# Altium PCB 150W LED Driver.PcbDoc
Units mm, origin at the board's own origin, x right, y up, seen from the top; angles counter-clockwise.
Board outline 72.5 x 50 mm, 4 copper layers (Top Layer, Layer 1, Layer 2, Bottom Layer), stack 1.573 mm thick; 37 components, 22 nets, 125 pads, 160 vias.
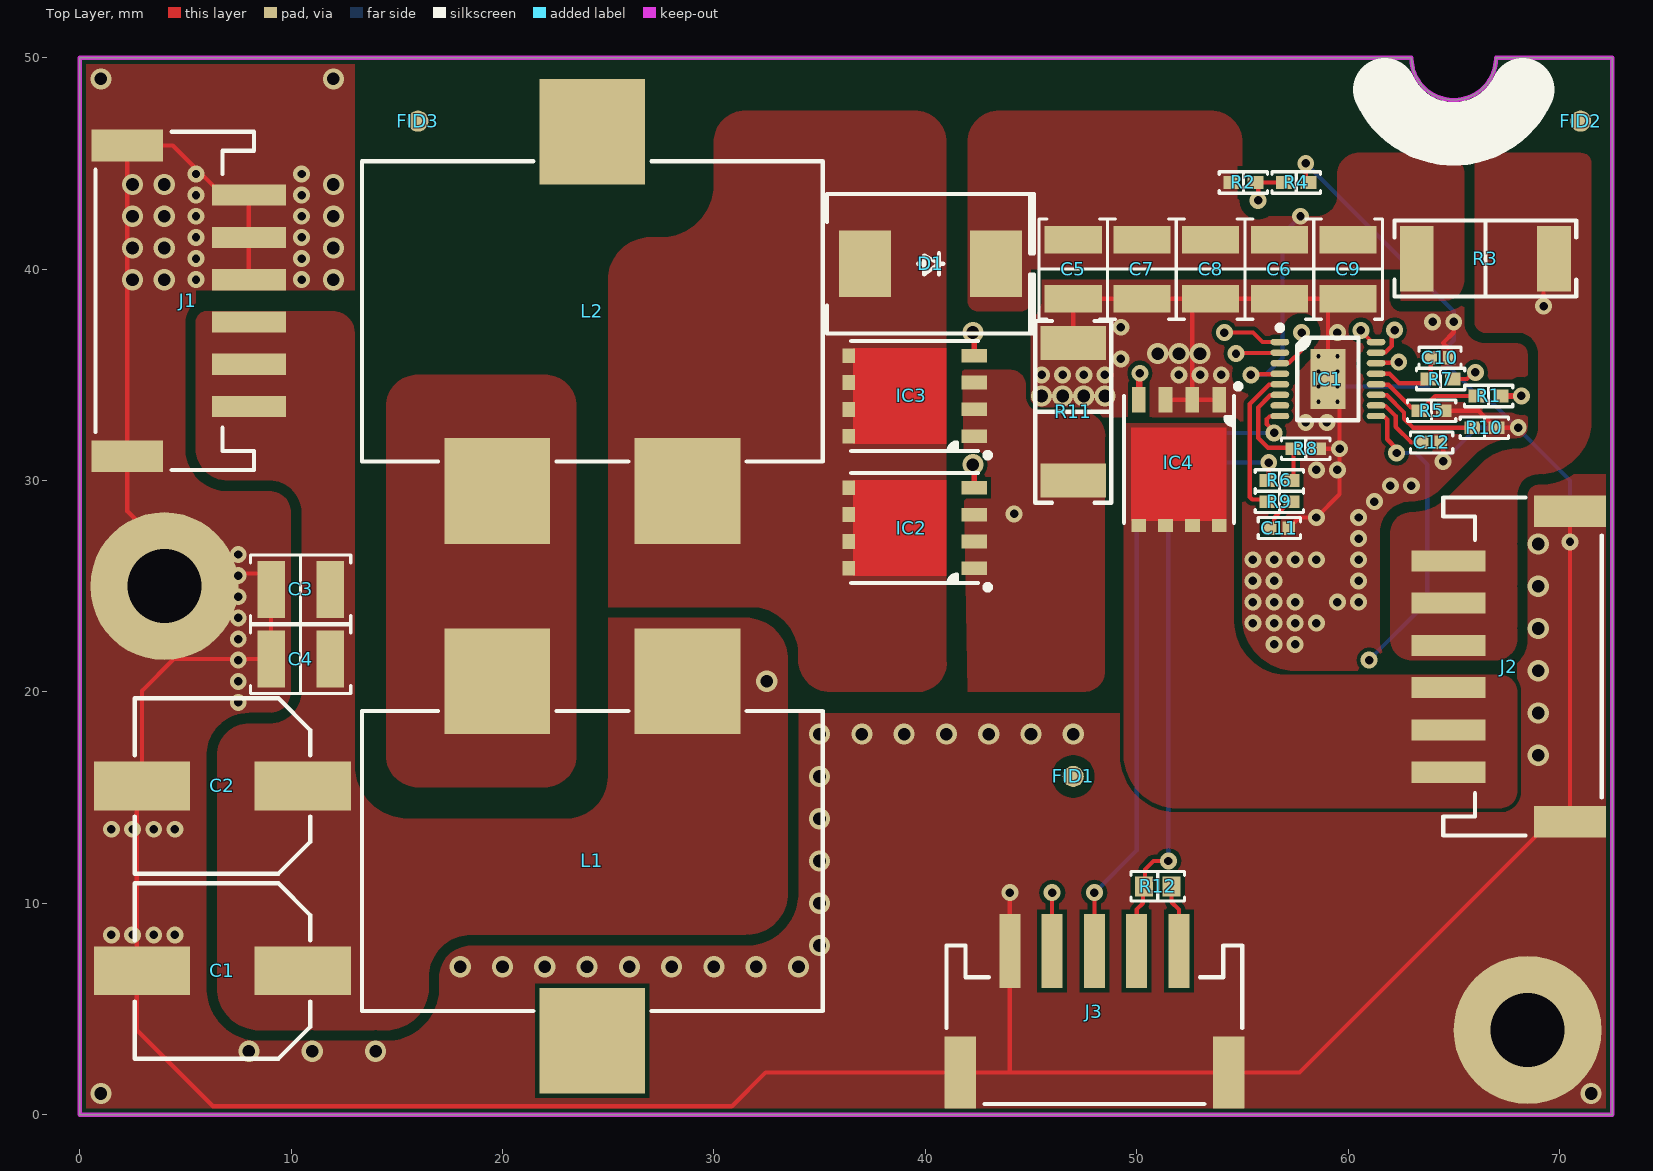
[diagram p0: Top Layer view]
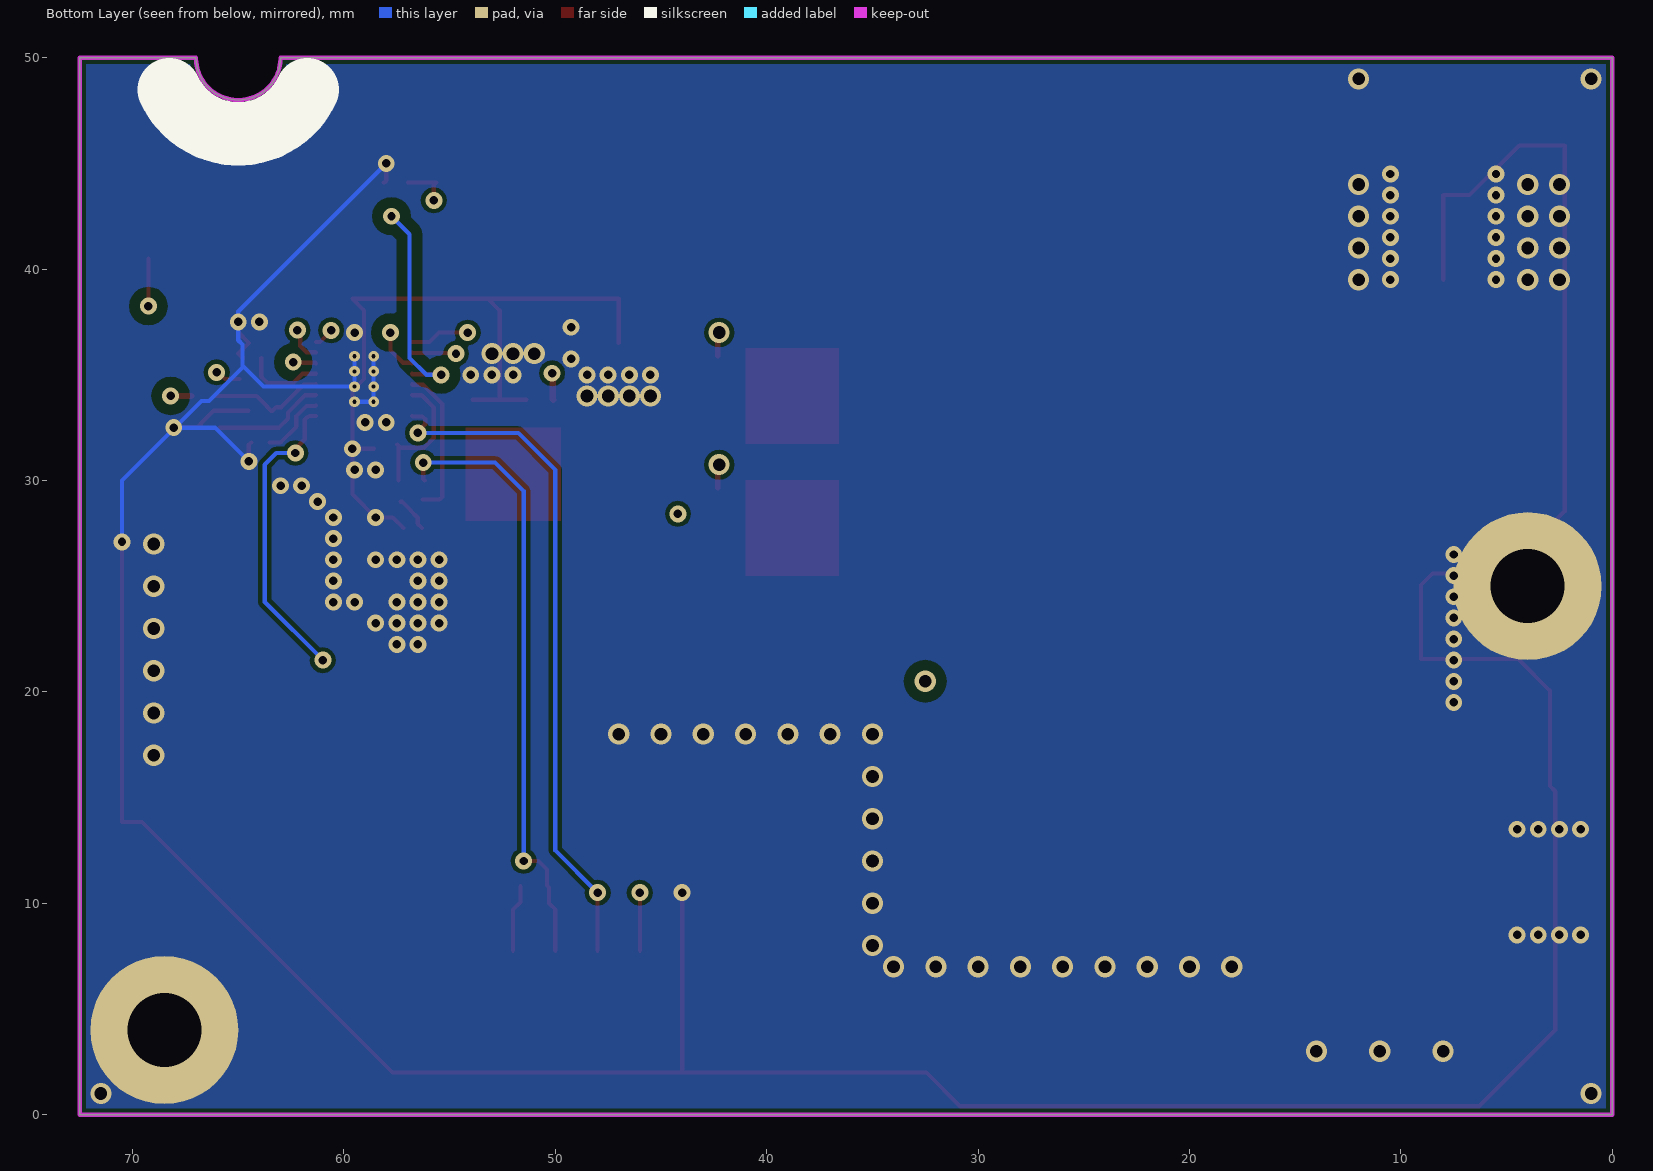
[diagram p1: Bottom Layer view, seen from below]
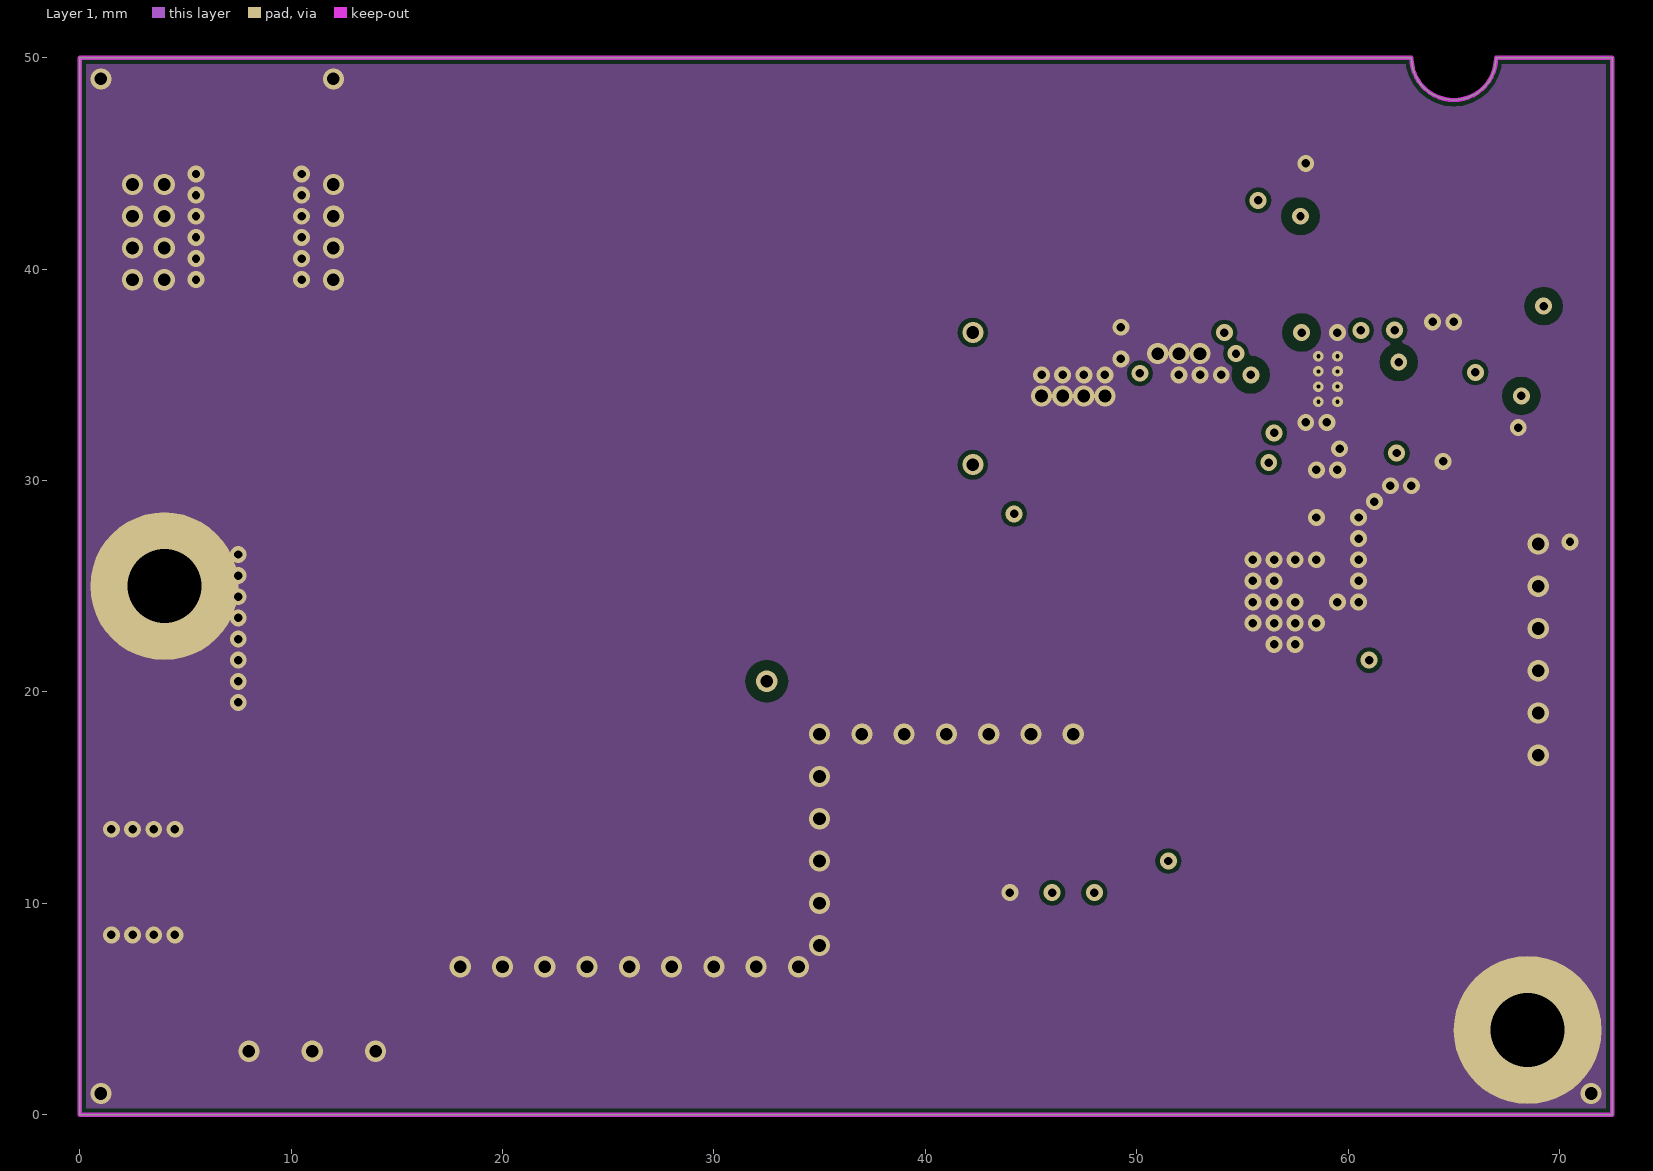
[diagram p2: Layer 1]
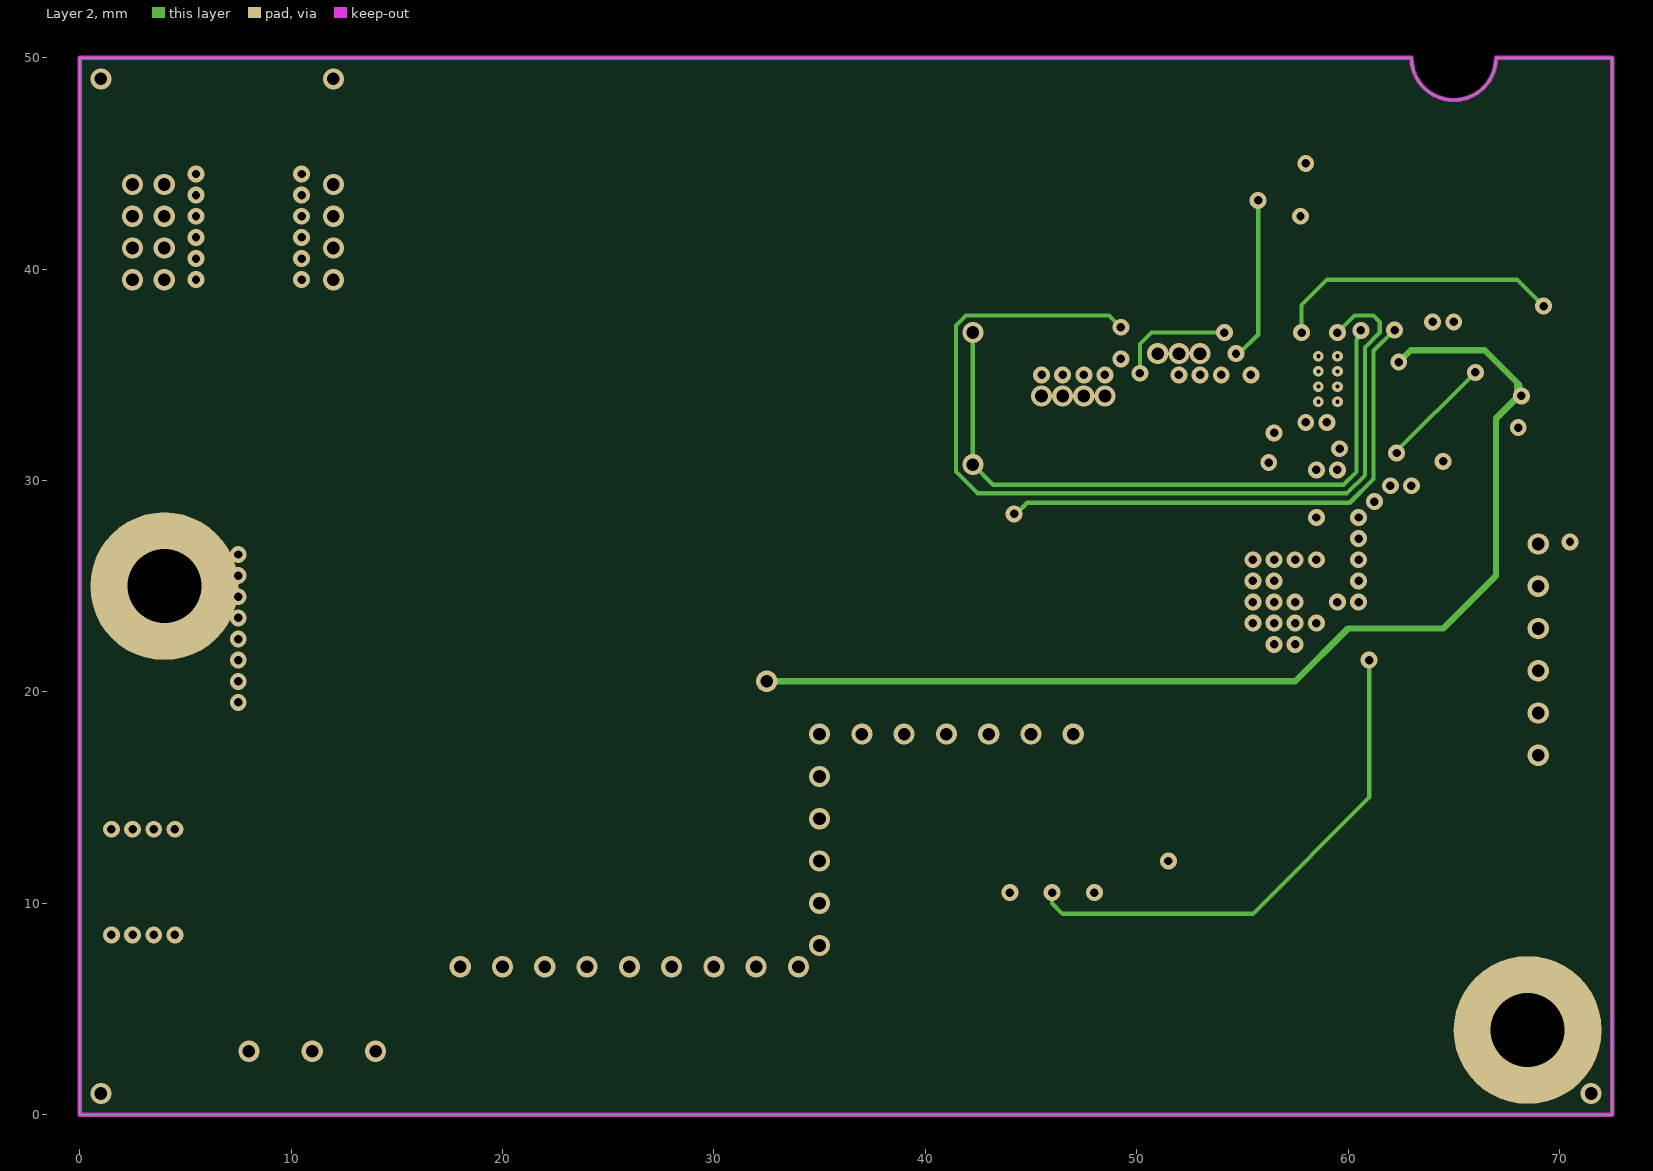
[diagram p3: Layer 2]

## Layer stack, top to bottom
Top Solder: solder mask 0.01, Solder Resist, Dk 3.5
Top Layer: signal copper 0.036
Dielectric 1: prepreg 0.2, PP-006, Dk 4.1
Layer 1: signal copper 0.018
Dielectric1: core 1.065, FR-4, Dk 4.8
Layer 2: signal copper 0.018
Dielectric 2: prepreg 0.2, PP-006, Dk 4.1
Bottom Layer: signal copper 0.036
Bottom Solder: solder mask 0.01, Solder Resist, Dk 3.5

## Board outline
0,0 0,50 63,50 ccw(c65,50) 65,48 ccw(c65,50) 67,50 72.5,50 72.5,0

## Design rules (kind name [scope] priority, off if disabled: settings)
Clearance Clearance_HV_Exception [WithinRoom('ClearanceException') AND InNetClass('HV') vs WithinRoom('ClearanceException') AND InNetClass('LP')] p1: gap=0.19 ignorepadtopadclearanceinfootprint=FALSE // Clearance exception for driver IC
Clearance Clearance_HV [InNetClass('HV') vs InNetClass('LP')] p2: gap=0.5 ignorepadtopadclearanceinfootprint=TRUE
Clearance PadClearance [IsPad vs IsPad] p3: gap=0.2 ignorepadtopadclearanceinfootprint=FALSE except(0: Arc-Hole Track-Hole SMDPad-Hole THPad-Hole Via-Hole Fill-Hole Poly-Hole Region-Hole Text-Hole; 0.15: SMDPad-SMDPad)
Clearance [All] p4: gap=0.2 ignorepadtopadclearanceinfootprint=FALSE except(0: Arc-Hole Track-Hole SMDPad-Hole THPad-Hole Via-Hole Fill-Hole Poly-Hole Region-Hole Text-Hole)
Creepage [InNetClass('HV') vs InNetClass('LP')] p1: checkdistance=0.2
HoleSize [All] p1: absolutevalues=TRUE maxlimit=6 minlimit=0.2 maxpercent=80.000 minpercent=20.000
HoleToHoleClearance [All] p1: gap=0.2 allowstackedmicrovias=TRUE
MinimumAnnularRing [All] p1: minimumring=0.15
MinimumSolderMaskSliver [All] p1: minsoldermaskwidth=0
PolygonConnect ViaConnect [IsVia] p1: connectstyle=Direct reliefconductorwidth=0.254 reliefentries=4 polygonreliefangle="90 Angle" airgapwidth=0.254
PolygonConnect [All] p2: connectstyle=Direct reliefconductorwidth=0.3 reliefentries=4 polygonreliefangle="90 Angle" airgapwidth=0.254
RoomDefinition ClearanceException [False] p1: confinementstyle=ConfineIn formatcopy=TRUE lockcomponents=FALSE outline 54.7,37.1 62.5,37.1 62.5,33.5 54.7,33.5
RoutingVias [All] p1: holewidth=0.6 width=1 viastyle="Through Hole" minholewidth=0.4 minwidth=0.8 maxholewidth=5 maxwidth=6
SilkToSilkClearance [All] p1: silktosilkclearance=0
SilkToSolderMaskClearance SilkscreenOverComponentPads [IsPad] p1: minsilkscreentomaskgap=0.05 clearancetoexposedcopper=TRUE
SolderMaskExpansion "Via Tenting" [IsVia] p1: expansion=-2 istentingtop=FALSE
SolderMaskExpansion [All] p2: expansion=0.102 istentingtop=FALSE
Width [All] p1: maxlimit=2 minlimit=0.2 preferedwidth=0.4
25 further rules are at their usual default settings.

## Classes and differential pairs
net class LP: CTRL FB GATE GND IADJ INTVCC LED_GND NetC11_2 NetC12_2 NetIC1_5 NetIC1_11 OPENLED PWMOUT SENSE UVLO
net class HV: 48V ISN ISP NetL1_2 SW
component class DRV: C1 C2 C3 C4 C5 C6 C7 C8 C9 C10 C11 C12 D1 IC1 IC2 IC3 IC4 L1 L2 R1 R2 R3 R4 R5 R6 R7 R8 R9 R10 R11
component class Connections: FID1 FID2 FID3 J1 J2 J3 R12

## Components (designator, comment, footprint, x,y, rotation, side; value= is the part's Value field where it differs from the comment)
C1 "47µF" "CAP ALSMD 8.3MM H10.5MM" 6.75,6.8 r180 top
C2 "47µF" "CAP ALSMD 8.3MM H10.5MM" 6.75,15.55 r180 top
C3 "10µF" "CAP 1210_3225 - 2.8MM" 10.45,24.85 r0 top
C4 "10µF" "CAP 1210_3225 - 2.8MM" 10.45,21.55 r0 top
C5 "4.7µF" "CAP 1210_3225 - 2.8MM" 47,40 r90 top
C6 "4.7µF" "CAP 1210_3225 - 2.8MM" 56.75,40 r90 top
C7 "4.7µF" "CAP 1210_3225 - 2.8MM" 50.25,40 r90 top
C8 "4.7µF" "CAP 1210_3225 - 2.8MM" 53.5,40 r90 top
C9 "4.7µF" "CAP 1210_3225 - 2.8MM" 60,40 r90 top
C10 "4.7µF" "CAP 0402_1005" 64.35,35.8 r180 top
C11 "2200pF" "CAP 0402_1005" 56.75,27.75 r180 top
C12 "0.1µF" "CAP 0402_1005" 63.95,31.8 r180 top
D1 "SK810L-TP" "DO214AB SMC" 40.25,40.25 r0 top
FID1 "Fiducial" Fiducial 47,16 r90 top
FID2 "Fiducial" Fiducial 71,47 r90 top
FID3 "Fiducial" Fiducial 16,47 r90 top
IC1 "LT3756EMSE-2#TRPBF" "LTC MSOP-16 MSE16" 59.05,34.8 r0 top
IC2 "BSC060N10NS3GATMA1" "INFINEON PG-TDSON-8" 39.5,27.75 r180 top
IC3 "BSC060N10NS3GATMA1" "INFINEON PG-TDSON-8" 39.5,34 r180 top
IC4 "BSC060N10NS3GATMA1" "INFINEON PG-TDSON-8" 52,31 r270 top
J1 "S6B-PH-SM4-TB(LF)(SN)" "JST S6B-PH-SM4-TB" 3.75,38.5 r90 top
J2 "S6B-PH-SM4-TB(LF)(SN)" "JST S6B-PH-SM4-TB" 69,21.2 r270 top
J3 "S5B-PH-SM4-TB(LF)(SN)" "JST S5B-PH-SM4-TB" 48,3.5 r180 top
L1 "47µH" "WURTH WE-HCF 14.5MM" 24.25,12 r180 top
L2 "47µH" "WURTH WE-HCF 14.5MM" 24.25,38 r0 top
R1 "732 kOhms" "RES 0402_1005" 66.65,34 r0 top
R2 "787 kOhms" "RES 0402_1005" 55.05,44.1 r180 top
R3 "56 mOhms" "STACKPOLE CSR2512" 66.5,40.5 r180 top
R4 "10 kOhms" "RES 0402_1005" 57.55,44.1 r180 top
R5 "23.2 kOhms" "RES 0402_1005" 63.95,33.3 r180 top
R6 "17.4 kOhms" "RES 0402_1005" 56.75,30 r0 top
R7 "100 kOhms" "RES 0402_1005" 64.375,34.8 r0 top
R8 "10 kOhms" "RES 0402_1005" 58,31.5 r180 top
R9 "10 kOhms" "RES 0402_1005" 56.75,29 r0 top
R10 "42.2 kOhms" "RES 0402_1005" 66.45,32.5 r180 top
R11 "20 mOhms" "STACKPOLE CSR2512" 47,33.25 r270 top
R12 "0 Ohms" "RES 0603_1608" 51,10.8 r0 top

## Footprints (in the part's own frame and the unit in brackets; to place one, negate y for a bottom-side part, rotate by r counter-clockwise, add the part's x,y. Pads: shape width x height; smd on the part's side, far side on the other; paste and mask are expansions set on the pad)
"CAP 0402_1005" [mm] "Chip Capacitor, 2-Leads, Body 1.02x0.51mm, IPC Medium Density"
  rect 0.6x0.64 smd: 1(-0.44,0) 2(0.44,0)
  silkscreen extent -1,-0.5 1,0.5, body extent -0.5,-0.26 0.5,0.26, height 0.52
"CAP 1210_3225 - 2.8MM" [mm] "Chip Capacitor, 2-Leads, Body 3.20x2.50mm, IPC Medium Density"
  rect 1.3x2.7 smd: 1(-1.4,0) 2(1.4,0)
  silkscreen extent -2.37,-1.63 2.37,1.63, body extent -1.6,-1.25 1.6,1.25, height 2.8
"CAP ALSMD 8.3MM H10.5MM" [mm] "Aluminum Electrolytic Capacitor, Body 8.30x8.30x10.50mm, IPC Low Density"
  rect 4.55x2.3 smd: 1(-3.8,0) 2(3.8,0)
  silkscreen extent -4.15,-4.15 4.15,4.15, body extent -4.95,-4.15 4.95,4.15, height 10.5
"DO214AB SMC" [mm] "Molded Diode, 2-Leads, Body 6.85x5.90mm, IPC Medium Density"
  rect 2.45x3.15 smd: 1(-3.1,0) 2(3.1,0)
  silkscreen extent -4.9,-3.3 4.9,3.3, body extent -3.97,-2.95 3.97,2.95, height 2.6
Fiducial [mm]
  round 1 smd paste-1 mask+0.5: F(0,0)
  Top Layer pour cut-out: 0,0
  Top Layer pour cut-out: -1,0 -0.924,0.383 -0.707,0.707 -0.383,0.924 0,1 0,1 0.383,0.924 0.707,0.707 0.924,0.383 1,0 1,0 0.924,-0.383 0.707,-0.707 0.383,-0.924 0,-1 0,-1 -0.383,-0.924 -0.707,-0.707 -0.924,-0.383 -1,0
"INFINEON PG-TDSON-8" [mm] "TDSON, 8-Leads, Body 6x5mm, Pitch 1.27mm, Thermal Pad 1.65x2.38mm, IPC Medium Density"
  rect 1.2x0.65 smd: 1(-2.825,1.905) 2(-2.825,0.635) 3(-2.825,-0.635) 4(-2.825,-1.905)
  rect 0.6x0.7 smd: 5(3.125,-1.905) 6(3.125,-0.635) 7(3.125,0.635) 8(3.125,1.905)
  Top Layer region: -1.5,-2.25 2.9,-2.25 2.9,2.25 -1.5,2.25
  silkscreen extent -3.58,-2.6 3,2.92, body extent -3.07,-2.58 3.08,2.57, height 1
"JST S5B-PH-SM4-TB" [mm] "JST PH Series 2mm pitch, side entry connector"
  rect 1x3.5 smd: 1(-4,-4.25) 2(-2,-4.25) 3(0,-4.25) 4(2,-4.25) 5(4,-4.25)
  rect 1.5x3.4 smd: M(-6.35,1.5) M(6.35,1.5)
  silkscreen extent -7,-4.5 7,3, body extent -6.95,-5.6 6.95,3.01, height 5.6
"JST S6B-PH-SM4-TB" [mm] "JST PH Series 2mm pitch, side entry connector"
  rect 1x3.5 smd: 1(-5,-4.25) 2(-3,-4.25) 3(-1,-4.25) 4(1,-4.25) 5(3,-4.25) 6(5,-4.25)
  rect 1.5x3.4 smd: M(-7.35,1.5) M(7.35,1.5)
  silkscreen extent -8,-4.5 8,3, body extent -7.95,-5.6 7.95,3.01, height 5.6
"LTC MSOP-16 MSE16" [mm] "16-Lead Plastic MSOP, Exposed Die Pad"
  oval 0.889x0.305 smd: 1(-2.275,1.75) 2(-2.275,1.25) 3(-2.275,0.75) 4(-2.275,0.25) 5(-2.275,-0.25) 6(-2.275,-0.75) 7(-2.275,-1.25) 8(-2.275,-1.75) 9(2.275,-1.75) 10(2.275,-1.25) 11(2.275,-0.75) 12(2.275,-0.25) 13(2.275,0.25) 14(2.275,0.75) 15(2.275,1.25) 16(2.275,1.75)
  rect 1.651x2.845 smd: 17(0,0)
  silkscreen extent -2.4,-1.95 1.45,2.55, body extent -2.49,-2.05 2.49,2.04, height 1.1
"RES 0402_1005" [mm] "Chip Resistor, 2-Leads, Body 1.0x0.5mm, IPC Medium Density"
  rect 0.75x0.6 smd: 1(-0.575,0) 2(0.575,0)
  silkscreen extent -1.14,-0.51 1.14,0.51, body extent -0.5,-0.25 0.5,0.25, height 0.35
"RES 0603_1608" [mm] "Chip Resistor, 2-Leads, Body 1.60x0.80mm, IPC Medium Density"
  rect 0.85x0.95 smd: 1(-0.65,0) 2(0.65,0)
  silkscreen extent -1.27,-0.7 1.27,0.7, body extent -0.8,-0.4 0.8,0.4, height 0.45
"STACKPOLE CSR2512" [mm] "Chip Resistor, 2-Leads, Body 6.40x3.20mm, IPC Medium Density"
  rect 1.6x3.1 smd: 1(-3.25,0) 2(3.25,0)
  silkscreen extent -4.3,-1.8 4.3,1.8, body extent -3.27,-1.6 3.28,1.6, height 0.5
"WURTH WE-HCF 14.5MM" [mm] "SMD High Current Inductor, body 21.8x14.2mm"
  rect 5x5 smd: 1(-4.5,-8.5) 2(4.5,-8.5) 3(0,8.5)
  silkscreen extent -10.9,-7.1 10.9,7.1, body extent -10.75,-10.6 10.75,10.4, height 14

## Part data
C1 C2: library part 63SEV47M8X10.5, "CAP ALUM 47UF 20% 63V SMD", Device Package="Radial, Can - SMD", Lifetime @ Temp.="2000 Hrs @ 85°C", Manufacturer=Rubycon, Operating Temperature="-40°C ~ 85°C", Ratings=AEC-Q200, Ripple Current @ High Frequency="255mA @ 10kHz", Ripple Current @ Low Frequency="170mA @ 120Hz", Supplier Part Number 1=1189-2502-1-ND, Tolerance=±20%, Voltage - Rated=63V, Applications=Automotive, Capacitance=47µF, ComponentLink1Description=Datasheet, ComponentLink1URL=http://www.rubycon.co.jp/en/catalog/e_pdfs/aluminum/e_sev.pdf, ComponentLink2Description="DigiKey Link", ComponentLink2URL=http://digikey.com/product-detail/en/rubycon/63SEV47M8X10.5/1189-2502-1-ND/4842406, Height - Seated (Max)="0.413\" (10.50mm)", LastUpdated="14/01/2020 00:14:53", Lifecycle Status=Active, Minimum Order=1, Mounting Type="Surface Mount", Package / Case="Radial, Can - SMD", Packaging=TapeAndReel, Part Number=63SEV47M8X10.5, Part Status=Active, PartId=7768, Polarization=Polar, Price=0.26, Series=SEV, Size / Dimension="0.315\" Dia (8.00mm)", Supplier 1=DigiKey, Surface Mount Land Size="0.327\" L x 0.327\" W (8.30mm x 8.30mm)"
C3 C4: library part CL32B106KMVNNWE, "CAP CER 10UF 63V X7R 1210", Device Package="1210 (3225 Metric)", Manufacturer="Samsung Electro-Mechanics", Operating Temperature="-55°C ~ 125°C", Supplier Part Number 1=1276-7053-1-ND, Temperature Coefficient=X7R, Tolerance=±10%, Voltage - Rated=63V, Applications="General Purpose", Capacitance=10µF, ComponentLink1Description=Datasheet, ComponentLink1URL=http://www.samsungsem.com/kr/support/product-search/mlcc/CL32B106KMVNNWE.jsp, ComponentLink2Description="DigiKey Link", ComponentLink2URL=http://digikey.com/product-detail/en/samsung-electro-mechanics/CL32B106KMVNNWE/1276-7053-1-ND/7320695, LastUpdated="14/01/2020 00:06:26", Lifecycle Status=Active, Minimum Order=1, Mounting Type="Surface Mount, MLCC", Package / Case="1210 (3225 Metric)", Packaging=TapeAndReel, Part Number=CL32B106KMVNNWE, Part Status=Active, PartId=23936, Price=0.26, Series=CL, Size / Dimension="0.126\" L x 0.098\" W (3.20mm x 2.50mm)", Supplier 1=DigiKey, Thickness (Max)="0.110\" (2.80mm)"
C5 C6 C7 C8 C9: library part HMK325BJ475KM-PE, "CAP CER 4.7UF 100V X5R 1210", Device Package="1210 (3225 Metric)", Manufacturer="Taiyo Yuden", Operating Temperature="-55°C ~ 85°C", Supplier Part Number 1=587-5034-1-ND, Temperature Coefficient=X5R, Tolerance=±10%, Voltage - Rated=100V, Applications="SMPS Filtering", Capacitance=4.7µF, ComponentLink1Description=Datasheet, ComponentLink1URL=http://www.yuden.co.jp/productdata/catalog/mlcc06_e.pdf, ComponentLink2Description="DigiKey Link", ComponentLink2URL=http://digikey.com/product-detail/en/taiyo-yuden/HMK325BJ475KM-PE/587-5034-1-ND/6563877, LastUpdated="14/01/2020 00:06:27", Lifecycle Status=Active, Minimum Order=1, Mounting Type="Surface Mount, MLCC", Package / Case="1210 (3225 Metric)", Packaging=TapeAndReel, Part Number=HMK325BJ475KM-PE, Part Status=Active, PartId=23699, Price=0.38, Series=M, Size / Dimension="0.126\" L x 0.098\" W (3.20mm x 2.50mm)", Supplier 1=DigiKey, Thickness (Max)="0.106\" (2.70mm)"
C10: library part GRM155R61A475MEAAD, "CAP CER 4.7UF 10V X5R 0402", Device Package="0402 (1005 Metric)", Manufacturer="Murata Electronics", Operating Temperature="-55°C ~ 85°C", Supplier Part Number 1=490-14306-2-ND, Temperature Coefficient=X5R, Tolerance=±20%, Voltage - Rated=10V, Applications="General Purpose", Capacitance=4.7µF, ComponentLink1Description=Datasheet, ComponentLink1URL=https://search.murata.co.jp/Ceramy/image/img/A01X/G101/ENG/GRM155R61A475MEAA-01.pdf, ComponentLink2Description="DigiKey Link", ComponentLink2URL=//digikey.com/product-detail/en/murata-electronics/GRM155R61A475MEAAD/490-14306-2-ND/6234735, LastUpdated="29-Nov-19 20:59:51", Lifecycle Status=0, Minimum Order=1, Mounting Type="Surface Mount, MLCC", Package / Case="0402 (1005 Metric)", Packaging=TapeAndReel, Part Number=GRM155R61A475MEAAD, Part Status=Active, PartId=6746, Price=0.03, Series=GRM, Size / Dimension="0.039\" L x 0.020\" W (1.00mm x 0.50mm)", Supplier 1=DigiKey, Thickness (Max)="0.026\" (0.65mm)"
C11: library part GRM155R71H222JA01J, "CAP CER 2200PF 50V X7R 0402", Device Package="0402 (1005 Metric)", Manufacturer="Murata Electronics", Operating Temperature="-55°C ~ 125°C", Supplier Part Number 1=490-6359-2-ND, Temperature Coefficient=X7R, Tolerance=±5%, Voltage - Rated=50V, Applications="General Purpose", Capacitance=2200pF, ComponentLink1Description=Datasheet, ComponentLink1URL=https://www.murata.com/~/media/webrenewal/support/library/catalog/products/capacitor/mlcc/c02e.ashx?la=en-us, ComponentLink2Description="DigiKey Link", ComponentLink2URL=//digikey.com/product-detail/en/murata-electronics/GRM155R71H222JA01J/490-6359-2-ND/2610934, LastUpdated="29-Nov-19 20:59:47", Lifecycle Status=0, Minimum Order=1, Mounting Type="Surface Mount, MLCC", Package / Case="0402 (1005 Metric)", Packaging=TapeAndReel, Part Number=GRM155R71H222JA01J, Part Status=Active, PartId=3973, Price=0.00, Series=GRM, Size / Dimension="0.039\" L x 0.020\" W (1.00mm x 0.50mm)", Supplier 1=DigiKey, Thickness (Max)="0.022\" (0.55mm)"
C12: library part EMK105BJ104MV-F, "CAP CER 0.1UF 16V X5R 0402", Device Package="0402 (1005 Metric)", Manufacturer="Taiyo Yuden", Operating Temperature="-55°C ~ 85°C", Supplier Part Number 1=587-5513-2-ND, Temperature Coefficient=X5R, Tolerance=±20%, Voltage - Rated=16V, Applications="General Purpose", Capacitance=0.1µF, ComponentLink1Description=Datasheet, ComponentLink1URL="https://ds.yuden.co.jp/TYCOMPAS/ut/detail?pn=EMK105BJ104MV-F &u=M", ComponentLink2Description="DigiKey Link", ComponentLink2URL=//digikey.com/product-detail/en/taiyo-yuden/EMK105BJ104MV-F/587-5513-2-ND/6702361, LastUpdated="29-Nov-19 20:59:42", Lifecycle Status=0, Minimum Order=1, Mounting Type="Surface Mount, MLCC", Package / Case="0402 (1005 Metric)", Packaging=TapeAndReel, Part Number=EMK105BJ104MV-F, Part Status=Active, PartId=1946, Price=0.00, Series=M, Size / Dimension="0.039\" L x 0.020\" W (1.00mm x 0.50mm)", Supplier 1=DigiKey, Thickness (Max)="0.022\" (0.55mm)"
D1: "DIODE SCHOTTKY 100V 8A DO214AB", Capacitance @ Vr, F="400pF @ 4V, 1MHz", Current - Average Rectified (Io)=8A, Current - Reverse Leakage @ Vr="1mA @ 100V", Device Package="DO-214AB, SMC", Manufacturer="Micro Commercial Co", Operating Temperature - Junction="-55°C ~ 150°C", Supplier Device Package="DO-214AB (SMC)", Supplier Part Number 1=SK810L-TPMSCT-ND, Voltage - DC Reverse (Vr) (Max)=100V, Voltage - Forward (Vf) (Max) @ If="800mV @ 8A", ComponentLink1Description=Datasheet, ComponentLink1URL=https://www.mccsemi.com/pdf/Products/SK82L-SK810L(SMC).PDF, ComponentLink2Description="DigiKey Link", ComponentLink2URL=http://digikey.com/product-detail/en/micro-commercial-co/SK810L-TP/SK810L-TPMSCT-ND/2650908, Diode Type=Schottky, LastUpdated="16/01/2020 00:15:26", Lifecycle Status=Active, Minimum Order=1, Mounting Type="Surface Mount", Package / Case="DO-214AB, SMC", Packaging=TapeAndReel, Part Number=SK810L-TP, Part Status=Active, PartId=1759, Price=0.22, Series=-, Speed="Fast Recovery =< 500ns, > 200mA (Io)", Supplier 1=DigiKey
IC1: "IC LED DRIVER CTRLR DIM 16MSOP", Device Package="16-TFSOP (0.118\", 3.00mm Width) Exposed Pad", Frequency="100kHz ~ 1MHz", Manufacturer="Linear Technology/Analog Devices", Operating Temperature="-40°C ~ 125°C (TJ)", Supplier Device Package=16-MSOP-EP, Supplier Part Number 1=LT3756EMSE-2#TRPBFTR-ND, Voltage - Output=100V, Voltage - Supply (Min)=6V, ComponentLink1Description=Datasheet, ComponentLink1URL=http://www.linear.com/docs/26674, ComponentLink2Description="DigiKey Link", ComponentLink2URL=//digikey.com/product-detail/en/linear-technology-analog-devices/LT3756EMSE-2-TRPBF/LT3756EMSE-2-TRPBFTR-ND/2107813, Dimming="Analog, PWM", Internal Switch(s)=No, LastUpdated="09-Dec-19 01:26:27", Lifecycle Status=0, Minimum Order=1, Mounting Type="Surface Mount", Number of Outputs=1, Package / Case="16-TFSOP (0.118\", 3.00mm Width) Exposed Pad", Packaging=TapeAndReel, Part Number=LT3756EMSE-2#TRPBF, Part Status=Active, PartId=5, Price=4.07, Series=-, Supplier 1=DigiKey, Topology="Flyback, SEPIC, Step-Down (Buck), Step-Up (Boost)", Type="DC DC Controller", Voltage - Supply (Max)=100V
IC2 IC3 IC4: "MOSFET N-CH 100V 90A TDSON-8", Current - Continuous Drain (Id) @ 25°C="14.9A (Ta), 90A (Tc)", Device Package=8-PowerTDFN, Drain to Source Voltage (Vdss)=100V, Drive Voltage (Max Rds On,  Min Rds On)="6V, 10V", Input Capacitance (Ciss) (Max) @ Vds="4900pF @ 50V", Manufacturer="Infineon Technologies", Operating Temperature="-55°C ~ 150°C (TJ)", Power Dissipation (Max)="125W (Tc)", Supplier Device Package=PG-TDSON-8-1, Supplier Part Number 1=BSC060N10NS3GATMA1TR-ND, ComponentLink1Description=Datasheet, ComponentLink1URL=https://www.infineon.com/dgdl/BSC060N10NS3+Rev2.4.pdf?folderId=db3a304313b8b5a60113cee8763b02d7&fileId=db3a30431ce5fb52011d1aab7f90133a, ComponentLink2Description="DigiKey Link", ComponentLink2URL=//digikey.com/product-detail/en/infineon-technologies/BSC060N10NS3GATMA1/BSC060N10NS3GATMA1TR-ND/2080630, FET Type=N-Channel, Gate Charge (Qg) (Max) @ Vgs="68nC @ 10V", LastUpdated="14-Dec-19 18:17:59", Lifecycle Status=0, Minimum Order=1, Mounting Type="Surface Mount", Package / Case=8-PowerTDFN, Packaging=TapeAndReel, Part Number=BSC060N10NS3GATMA1, Part Status=Active, Price=1.25, Rds On (Max) @ Id, Vgs="6mOhm @ 50A, 10V", Series=OptiMOS™, Supplier 1=DigiKey, Technology="MOSFET (Metal Oxide)", Vgs (Max)=±20V, Vgs(th) (Max) @ Id="3.5V @ 90µA"
J1 J2: "CONN HEADER SMD R/A 6POS 2MM", Current Rating (Amps)=2A, Insulation Color=Natural, Manufacturer="JST Sales America Inc.", Material Flammability Rating="UL94 V-0", Operating Temperature="-25°C ~ 85°C", Supplier Part Number 1=455-1753-1-ND, Voltage Rating=100V, ComponentLink1Description=Datasheet, ComponentLink1URL=http://www.jst-mfg.com/product/pdf/eng/ePH.pdf, ComponentLink2Description="DigiKey Link", ComponentLink2URL=http://digikey.com/product-detail/en/jst-sales-america-inc/S6B-PH-SM4-TB-LF-SN/455-1753-1-ND/926850, Connector Type=Header, Contact Finish - Mating=Tin, Contact Finish - Post=Tin, Contact Length - Mating="0.130\" (3.30mm)", Contact Material="Copper Alloy", Contact Shape=Square, Contact Type="Male Pin", Fastening Type="Detent Lock", Features="Solder Retention", Insulation Height="0.217\" (5.51mm)", Insulation Material="Polyamide (PA6T), Nylon 6T", LastUpdated="15/01/2020 03:38:11", Lifecycle Status=Active, Minimum Order=1, Mounting Type="Surface Mount, Right Angle", Number of Positions=6, Number of Positions Loaded=All, Number of Rows=1, Packaging=TapeAndReel, Part Number=S6B-PH-SM4-TB(LF)(SN), Part Status=Active, PartId=112, Pitch - Mating="0.079\" (2.00mm)", Price=0.45, Series=PH, Shrouding="Shrouded - 4 Wall", Style="Board to Cable/Wire", Supplier 1=DigiKey, Termination=Solder
J3: "CONN HEADER SMD R/A 5POS 2MM", Current Rating (Amps)=2A, Insulation Color=Natural, Manufacturer="JST Sales America Inc.", Material Flammability Rating="UL94 V-0", Operating Temperature="-25°C ~ 85°C", Supplier Part Number 1=455-1752-1-ND, Voltage Rating=100V, ComponentLink1Description=Datasheet, ComponentLink1URL=http://www.jst-mfg.com/product/pdf/eng/ePH.pdf, ComponentLink2Description="DigiKey Link", ComponentLink2URL=http://digikey.com/product-detail/en/jst-sales-america-inc/S5B-PH-SM4-TB-LF-SN/455-1752-1-ND/926849, Connector Type=Header, Contact Finish - Mating=Tin, Contact Finish - Post=Tin, Contact Length - Mating="0.130\" (3.30mm)", Contact Material="Copper Alloy", Contact Shape=Square, Contact Type="Male Pin", Fastening Type="Detent Lock", Features="Solder Retention", Insulation Height="0.217\" (5.51mm)", Insulation Material="Polyamide (PA6T), Nylon 6T", LastUpdated="15/01/2020 03:45:44", Lifecycle Status=Active, Minimum Order=1, Mounting Type="Surface Mount, Right Angle", Number of Positions=5, Number of Positions Loaded=All, Number of Rows=1, Packaging=TapeAndReel, Part Number=S5B-PH-SM4-TB(LF)(SN), Part Status=Active, PartId=118, Pitch - Mating="0.079\" (2.00mm)", Price=0.39, Series=PH, Shrouding="Shrouded - 4 Wall", Style="Board to Cable/Wire", Supplier 1=DigiKey, Termination=Solder
L1 L2: library part 7443634700, "FIXED IND 47UH 12A 12.2 MOHM SMD", Current - Saturation=8.5A, Current Rating (Amps)=12A, DC Resistance (DCR)=12.2mOhm, Device Package=Nonstandard, Frequency - Self Resonant=10MHz, Inductance Frequency - Test=100kHz, Manufacturer="Würth Elektronik", Operating Temperature="-40°C ~ 125°C", Supplier Part Number 1=732-2525-1-ND, Tolerance=±15%, ComponentLink1Description=Datasheet, ComponentLink1URL=https://katalog.we-online.de/pbs/datasheet/7443634700.pdf, ComponentLink2Description="DigiKey Link", ComponentLink2URL=http://digikey.com/product-detail/en/w-rth-elektronik/7443634700/732-2525-1-ND/2440408, Height - Seated (Max)="0.571\" (14.50mm)", Inductance=47µH, LastUpdated="14/01/2020 00:14:51", Lifecycle Status=Active, Material - Core="Manganese Zinc Ferrite (MnZn)", Minimum Order=1, Mounting Type="Surface Mount", Package / Case=Nonstandard, Packaging=TapeAndReel, Part Number=7443634700, Part Status=Active, PartId=3230, Price=5.04, Series=WE-HCF, Shielding=Shielded, Size / Dimension="0.858\" L x 0.846\" W (21.80mm x 21.50mm)", Supplier 1=DigiKey, Type=Wirewound
R1: library part ERJ-2RKF7323X, "RES SMD 732K OHM 1% 1/10W 0402", Device Package="0402 (1005 Metric)", Manufacturer="Panasonic Electronic Components", Operating Temperature="-55°C ~ 155°C", Power (Watts)="0.1W, 1/10W", Ratings=AEC-Q200, Supplier Device Package=0402, Supplier Part Number 1=P732KLCT-ND, Temperature Coefficient=±100ppm/°C, Tolerance=±1%, ComponentLink1Description=Datasheet, ComponentLink1URL=https://industrial.panasonic.com/cdbs/www-data/pdf/RDA0000/AOA0000C304.pdf, ComponentLink2Description="DigiKey Link", ComponentLink2URL=http://digikey.com/product-detail/en/panasonic-electronic-components/ERJ-2RKF7323X/P732KLCT-ND/194512, Composition="Thick Film", Features="Automotive AEC-Q200", Height - Seated (Max)="0.016\" (0.40mm)", LastUpdated="16/01/2020 05:37:05", Lifecycle Status=Active, Minimum Order=1, Number of Terminations=2, Package / Case="0402 (1005 Metric)", Packaging=CutTape, Part Number=ERJ-2RKF7323X, Part Status=Active, PartId=6419, Price=0.10, Resistance="732 kOhms", Series=ERJ, Size / Dimension="0.039\" L x 0.020\" W (1.00mm x 0.50mm)", Supplier 1=DigiKey
R2: library part ERJ-2RKF7873X, "RES SMD 787K OHM 1% 1/10W 0402", Device Package="0402 (1005 Metric)", Manufacturer="Panasonic Electronic Components", Operating Temperature="-55°C ~ 155°C", Power (Watts)="0.1W, 1/10W", Ratings=AEC-Q200, Supplier Device Package=0402, Supplier Part Number 1=P787KLCT-ND, Temperature Coefficient=±100ppm/°C, Tolerance=±1%, ComponentLink1Description=Datasheet, ComponentLink1URL=https://industrial.panasonic.com/cdbs/www-data/pdf/RDA0000/AOA0000C304.pdf, ComponentLink2Description="DigiKey Link", ComponentLink2URL=http://digikey.com/product-detail/en/panasonic-electronic-components/ERJ-2RKF7873X/P787KLCT-ND/194524, Composition="Thick Film", Features="Automotive AEC-Q200", Height - Seated (Max)="0.016\" (0.40mm)", LastUpdated="14/01/2020 00:04:33", Lifecycle Status=Active, Minimum Order=1, Number of Terminations=2, Package / Case="0402 (1005 Metric)", Packaging=CutTape, Part Number=ERJ-2RKF7873X, Part Status=Active, PartId=6458, Price=0.10, Resistance="787 kOhms", Series=ERJ, Size / Dimension="0.039\" L x 0.020\" W (1.00mm x 0.50mm)", Supplier 1=DigiKey
R3: library part KRL3264-C-R056-F-T1, "RES 0.056 OHM 1% 1W 3264", Device Package="2512 (6432 Metric)", Manufacturer=Susumu, Operating Temperature="-55°C ~ 175°C", Power (Watts)=1W, Ratings=AEC-Q200, Supplier Device Package=3264, Supplier Part Number 1=KRL32C.056CT-ND, Temperature Coefficient=±50ppm/°C, Tolerance=±1%, ComponentLink1Description=Datasheet, ComponentLink1URL=http://www.susumu.co.jp/common/pdf/usa_products_21.pdf, ComponentLink2Description="DigiKey Link", ComponentLink2URL=http://digikey.com/product-detail/en/susumu/KRL3264-C-R056-F-T1/KRL32C.056CT-ND/1936086, Composition="Metal Foil", Features="Automotive AEC-Q200, Current Sense", Height - Seated (Max)="0.028\" (0.70mm)", LastUpdated="14/01/2020 00:10:54", Lifecycle Status=Active, Minimum Order=1, Number of Terminations=2, Package / Case="2512 (6432 Metric)", Packaging=TapeAndReel, Part Number=KRL3264-C-R056-F-T1, Part Status=Active, PartId=1808, Price=0.19, Resistance="56 mOhms", Series=KRL, Size / Dimension="0.248\" L x 0.122\" W (6.30mm x 3.10mm)", Supplier 1=DigiKey
R4 R8 R9: library part ERJ-2RKF1002X, "RES SMD 10K OHM 1% 1/10W 0402", Device Package="0402 (1005 Metric)", Manufacturer="Panasonic Electronic Components", Operating Temperature="-55°C ~ 155°C", Power (Watts)="0.1W, 1/10W", Ratings=AEC-Q200, Supplier Device Package=0402, Supplier Part Number 1=P10.0KLCT-ND, Temperature Coefficient=±100ppm/°C, Tolerance=±1%, ComponentLink1Description=Datasheet, ComponentLink1URL=https://industrial.panasonic.com/cdbs/www-data/pdf/RDA0000/AOA0000C304.pdf, ComponentLink2Description="DigiKey Link", ComponentLink2URL=http://digikey.com/product-detail/en/panasonic-electronic-components/ERJ-2RKF1002X/P10.0KLCT-ND/194119, Composition="Thick Film", Features="Automotive AEC-Q200", Height - Seated (Max)="0.016\" (0.40mm)", LastUpdated="14/01/2020 00:04:08", Lifecycle Status=Active, Minimum Order=1, Number of Terminations=2, Package / Case="0402 (1005 Metric)", Packaging=CutTape, Part Number=ERJ-2RKF1002X, Part Status=Active, PartId=19601, Price=0.10, Resistance="10 kOhms", Series=ERJ, Size / Dimension="0.039\" L x 0.020\" W (1.00mm x 0.50mm)", Supplier 1=DigiKey
R5: library part ERJ-2RKF2322X, "RES SMD 23.2K OHM 1% 1/10W 0402", Device Package="0402 (1005 Metric)", Manufacturer="Panasonic Electronic Components", Operating Temperature="-55°C ~ 155°C", Power (Watts)="0.1W, 1/10W", Ratings=AEC-Q200, Supplier Device Package=0402, Supplier Part Number 1=P23.2KLCT-ND, Temperature Coefficient=±100ppm/°C, Tolerance=±1%, ComponentLink1Description=Datasheet, ComponentLink1URL=https://industrial.panasonic.com/cdbs/www-data/pdf/RDA0000/AOA0000C304.pdf, ComponentLink2Description="DigiKey Link", ComponentLink2URL=http://digikey.com/product-detail/en/panasonic-electronic-components/ERJ-2RKF2322X/P23.2KLCT-ND/194275, Composition="Thick Film", Features="Automotive AEC-Q200", Height - Seated (Max)="0.016\" (0.40mm)", LastUpdated="14/01/2020 00:04:05", Lifecycle Status=Active, Minimum Order=1, Number of Terminations=2, Package / Case="0402 (1005 Metric)", Packaging=CutTape, Part Number=ERJ-2RKF2322X, Part Status=Active, PartId=21321, Price=0.10, Resistance="23.2 kOhms", Series=ERJ, Size / Dimension="0.039\" L x 0.020\" W (1.00mm x 0.50mm)", Supplier 1=DigiKey
R6: library part ERJ-2RKF1742X, "RES SMD 17.4K OHM 1% 1/10W 0402", Device Package="0402 (1005 Metric)", Manufacturer="Panasonic Electronic Components", Operating Temperature="-55°C ~ 155°C", Power (Watts)="0.1W, 1/10W", Ratings=AEC-Q200, Supplier Device Package=0402, Supplier Part Number 1=P17.4KLCT-ND, Temperature Coefficient=±100ppm/°C, Tolerance=±1%, ComponentLink1Description=Datasheet, ComponentLink1URL=https://industrial.panasonic.com/cdbs/www-data/pdf/RDA0000/AOA0000C304.pdf, ComponentLink2Description="DigiKey Link", ComponentLink2URL=http://digikey.com/product-detail/en/panasonic-electronic-components/ERJ-2RKF1742X/P17.4KLCT-ND/194209, Composition="Thick Film", Features="Automotive AEC-Q200", Height - Seated (Max)="0.016\" (0.40mm)", LastUpdated="14/01/2020 00:04:33", Lifecycle Status=Active, Minimum Order=1, Number of Terminations=2, Package / Case="0402 (1005 Metric)", Packaging=CutTape, Part Number=ERJ-2RKF1742X, Part Status=Active, PartId=6542, Price=0.10, Resistance="17.4 kOhms", Series=ERJ, Size / Dimension="0.039\" L x 0.020\" W (1.00mm x 0.50mm)", Supplier 1=DigiKey
R7: library part ERJ-PA2J104X, "RES SMD 100K OHM 5% 1/5W 0402", Device Package="0402 (1005 Metric)", Manufacturer="Panasonic Electronic Components", Operating Temperature="-55°C ~ 155°C", Power (Watts)="0.2W, 1/5W", Ratings=AEC-Q200, Supplier Device Package=0402, Supplier Part Number 1=P17205CT-ND, Temperature Coefficient=±200ppm/°C, Tolerance=±5%, ComponentLink1Description=Datasheet, ComponentLink1URL=https://industrial.panasonic.com/cdbs/www-data/pdf/RDO0000/AOA0000C331.pdf, ComponentLink2Description="DigiKey Link", ComponentLink2URL=http://digikey.com/product-detail/en/panasonic-electronic-components/ERJ-PA2J104X/P17205CT-ND/5402693, Composition="Thick Film", Features="Automotive AEC-Q200, Pulse Withstanding", Height - Seated (Max)="0.016\" (0.40mm)", LastUpdated="14/01/2020 00:04:10", Lifecycle Status=Active, Minimum Order=1, Number of Terminations=2, Package / Case="0402 (1005 Metric)", Packaging=TapeAndReel, Part Number=ERJ-PA2J104X, Part Status=Active, PartId=18595, Price=0.01, Resistance="100 kOhms", Series=ERJ, Size / Dimension="0.039\" L x 0.020\" W (1.00mm x 0.50mm)", Supplier 1=DigiKey
R10: library part ERJ-2RKF4222X, "RES SMD 42.2K OHM 1% 1/10W 0402", Device Package="0402 (1005 Metric)", Manufacturer="Panasonic Electronic Components", Operating Temperature="-55°C ~ 155°C", Power (Watts)="0.1W, 1/10W", Ratings=AEC-Q200, Supplier Device Package=0402, Supplier Part Number 1=P42.2KLCT-ND, Temperature Coefficient=±100ppm/°C, Tolerance=±1%, ComponentLink1Description=Datasheet, ComponentLink1URL=https://industrial.panasonic.com/cdbs/www-data/pdf/RDA0000/AOA0000C304.pdf, ComponentLink2Description="DigiKey Link", ComponentLink2URL=http://digikey.com/product-detail/en/panasonic-electronic-components/ERJ-2RKF4222X/P42.2KLCT-ND/194399, Composition="Thick Film", Features="Automotive AEC-Q200", Height - Seated (Max)="0.016\" (0.40mm)", LastUpdated="14/01/2020 00:04:38", Lifecycle Status=Active, Minimum Order=1, Number of Terminations=2, Package / Case="0402 (1005 Metric)", Packaging=CutTape, Part Number=ERJ-2RKF4222X, Part Status=Active, PartId=3877, Price=0.10, Resistance="42.2 kOhms", Series=ERJ, Size / Dimension="0.039\" L x 0.020\" W (1.00mm x 0.50mm)", Supplier 1=DigiKey
R11: library part CSRN2512FK20L0, "RES 0.02 OHM 1% 2W 2512", Device Package="2512 (6432 Metric)", Manufacturer="Stackpole Electronics Inc", Operating Temperature="-55°C ~ 155°C", Power (Watts)=2W, Supplier Device Package=2512, Supplier Part Number 1=CSRN2512FK20L0CT-ND, Temperature Coefficient=±200ppm/°C, Tolerance=±1%, ComponentLink1Description=Datasheet, ComponentLink1URL=https://www.seielect.com/catalog/sei-csr_csrn.pdf, ComponentLink2Description="DigiKey Link", ComponentLink2URL=http://digikey.com/product-detail/en/stackpole-electronics-inc/CSRN2512FK20L0/CSRN2512FK20L0CT-ND/1646253, Composition="Thick Film", Features="Current Sense", Height - Seated (Max)="0.028\" (0.70mm)", LastUpdated="14/01/2020 00:10:55", Lifecycle Status=Active, Minimum Order=1, Number of Terminations=2, Package / Case="2512 (6432 Metric)", Packaging=TapeAndReel, Part Number=CSRN2512FK20L0, Part Status=Active, PartId=1775, Price=0.16, Resistance="20 mOhms", Series=CSRN, Size / Dimension="0.250\" L x 0.124\" W (6.35mm x 3.15mm)", Supplier 1=DigiKey
R12: library part ERJ-3GEY0R00V, "RES SMD 0 OHM JUMPER 1/10W 0603", Device Package="0603 (1608 Metric)", Manufacturer="Panasonic Electronic Components", Operating Temperature="-55°C ~ 155°C", Power (Watts)="0.1W, 1/10W", Ratings=AEC-Q200, Supplier Device Package=0603, Supplier Part Number 1=P0.0GCT-ND, Tolerance=Jumper, ComponentLink1Description=Datasheet, ComponentLink1URL=http://industrial.panasonic.com/www-cgi/jvcr13pz.cgi?E+PZ+3+AOA0001+ERJ3GEY0R00V+7+WW, ComponentLink2Description="DigiKey Link", ComponentLink2URL=http://digikey.com/product-detail/en/panasonic-electronic-components/ERJ-3GEY0R00V/P0.0GCT-ND/134711, Composition="Thick Film", Features="Automotive AEC-Q200", Height - Seated (Max)="0.022\" (0.55mm)", LastUpdated="15/01/2020 00:08:11", Lifecycle Status=Active, Minimum Order=1, Number of Terminations=2, Package / Case="0603 (1608 Metric)", Packaging=TapeAndReel, Part Number=ERJ-3GEY0R00V, Part Status=Active, PartId=22603, Price=0.01, Resistance="0 Ohms", Series=ERJ, Size / Dimension="0.063\" L x 0.031\" W (1.60mm x 0.80mm)", Supplier 1=DigiKey

## Free pads (board coordinates)
  round 7 hole 3.5: M(4,25) M(68.5,4)

## Via types
v1: diameter 0.8, hole 0.4, Top Layer to Bottom Layer, 96 vias
v2: diameter 1, hole 0.6, Top Layer to Bottom Layer, 56 vias
v3: diameter 0.5, hole 0.2, Top Layer to Bottom Layer, 8 vias

## Nets (pads, with @x,y where several pads share a name; then routed paths per layer and width w, separated by ;. In a path a pad name is that pad's centre, name@x,y a point inside that pad or via, vN(x,y) a via of type N, cw(c..) or ccw(c..) an arc to the next point about the centre after c; other vN are vias at no path point)
3V3: J3.1 R12.2 | length 3.2
  Top Layer w0.2: R12.2 51.65,10.05 52,9.7 J3.1
48V: C1.1 C2.1 C3.2 C4.2 IC1.14 J1.1 J1.2 J1.3 L1.1 R1.2 | length 55.5
  Top Layer w0.2: IC1.14 61.345,35.57 62.37,35.57 v1(62.4,35.6)
  Top Layer w0.3: R1.2 v1(68.2,34)
  Layer 2 w0.3: v2(32.5,20.5) 57.5,20.5 60,23 64.5,23 67,25.5 67,32.935 68.065,34 v1(68.2,34) 68.104,34.096 68.104,34.518 68,34.622 ; v1(62.4,35.6) 62.963,36.163 66.46,36.163 68,34.622 ; v1@68,34 68,34.622
CTRL: IC1.6 R6.2 R8.2 | length 6.3
  Top Layer w0.2: IC1.6 56.755,34.03 56.323,34.03 55.75,33.457 55.75,32.01 56.21,31.55 57.325,31.55 R8.2@57.425,31.65 ; R6.2@57.425,30 R8.2@57.425,31.65 ; R8.2@57.475,31.7 R8.2@57.425,31.65
FB: IC1.2 R2.1 R4.2 | length 12
  Top Layer w0.2: v1@54.7,36.03 56.755,36.03 IC1.2 ; v1(55.75,43.25) 55.75,43.975 R2.1 R4.2
  Layer 2 w0.2: v1@54.85,36 55.75,36.9 v1(55.75,43.25)
  other v1: 54.7,36
GATE: IC1.16 IC2.4 IC3.4 | length 35.1
  Top Layer w0.2: v1(60.61,37.1) 60.61,37.068 61.128,36.55 IC1.16
  Top Layer w0.254: v2(42.25,30.75) cw(c42.25,30.675) 42.325,30.675 IC2.4 ; v2(42.25,37) cw(c42.25,36.925) 42.325,36.925 IC3.4
  Layer 2 w0.2: v2(42.25,37) v2(42.25,30.75) 43.2,29.8 59.79,29.8 60.4,30.41 60.4,36.683 60.631,36.914 60.631,37.079 v1(60.61,37.1)
GND: C1.2 C2.2 C3.1 C4.1 C5.1 C6.1 C7.1 C8.1 C9.1 C10.1 C11.1 C12.1 IC1.17 IC4.1 IC4.2 IC4.3 J1.4 J1.5 J1.6 J1.M J2.M J3.5 J3.M pad.M R4.1 R5.1 R8.1 R10.1 R11.1 | length 287.9
  Top Layer w0.2: J1.4 J1.5 J1.6 6.75,43.5 4.4,45.85 2.25,45.85 2.25,31.15 2.25,28.55 5.2,25.6 8.5,25.6 9.05,25.05 C3.1 C4.1 4.45,21.55 2.95,20.05 C2.2 2.7,15.3 2.7,4 6.3,0.4 30.85,0.4 32.45,2 41.65,2 44,2 ; v1(44,10.5) J3.5 44,2 ; R11.1 C5.1 C7.1 C8.1@53.185,38.6 ; IC4.3 IC4.2 ; IC4.1 IC4.2 ; C11.1 57.69,28.25 v1(58.5,28.25) 59.6,29.35 v1(59.6,31.5) ; v1(58,45) 58,44.225 ccw(c58.125,44.225) R4.1 ; R8.1 v1(59.6,31.5) ; C12.1 64.5,31.69 v1(64.5,30.9) ; R5.1 66.174,33.3 66.75,32.724 66.75,32.7 66.95,32.5 R10.1 v1(68.05,32.5) ; C10.1 65,36.01 64.5,36.51 65,37.01 v1(65,37.5) ; J2.M@70.5,28.55 70.5,13.85 69.55,13.85 57.7,2 54.35,2 44,2 ; IC4.2 52.635,38.05 C8.1@53.185,38.6 ; C8.1@53.185,38.6 C8.1 C6.1 59.6,38.6 59.05,38.05 IC1.17 59.6,34.25 v1(59.6,31.5)
  Layer 2 w0.2: v1(49.25,37.25) 48.7,37.8 41.919,37.8 41.45,37.331 41.45,30.419 42.469,29.4 59.956,29.4 60.8,30.244 60.8,36.3 61.5,37 61.5,37.5 61.2,37.8 60.3,37.8 v1(59.5,37)
  Bottom Layer w0.2: v1(58,45) 65,38 v1(65,37.5) 65,36.635 64.8,36.435 64.8,35.435 ; v3(58.6,35.875) v3(58.6,35.158) v3(58.6,34.442) v3(58.6,33.725) v3(59.5,33.725) ; v3(59.5,35.875) v3(59.5,35.158) v3(59.5,34.442) 63.807,34.442 64.8,35.435 ; v1(64.5,30.9) 66.1,32.5 v1(68.05,32.5) ; v1(70.5,27.1) 70.5,30 66.738,33.762 66.385,33.762 64.8,35.348 64.8,35.435
  other v1: 1.5,8.5 2.5,8.5 3.5,8.5 4.5,8.5 1.5,13.5 2.5,13.5 3.5,13.5 4.5,13.5 7.5,19.5 7.5,20.5 7.5,21.5 56.5,22.25 57.5,22.25 7.5,22.5 55.5,23.25 56.5,23.25 57.5,23.25 58.5,23.25 7.5,23.5 55.5,24.25 56.5,24.25 57.5,24.25 59.5,24.25 60.5,24.25 7.5,24.5 55.5,25.25 56.5,25.25 60.5,25.25 7.5,25.5 55.5,26.25 56.5,26.25 57.5,26.25 58.5,26.25 60.5,26.25 7.5,26.5 60.5,27.25 60.5,28.25 61.25,29 62,29.75 63,29.75 58.5,30.5 59.5,30.5 58,32.75 59,32.75 45.5,35 46.5,35 47.5,35 48.5,35 52,35 53,35 54,35 49.25,35.75 64,37.5 5.5,39.5 10.5,39.5 5.5,40.5 10.5,40.5 5.5,41.5 10.5,41.5 5.5,42.5 10.5,42.5 5.5,43.5 10.5,43.5 5.5,44.5 10.5,44.5
  other v2: 1,1 71.5,1 8,3 11,3 14,3 18,7 20,7 22,7 24,7 26,7 28,7 30,7 32,7 34,7 35,8 35,10 35,12 35,14 35,16 69,17 35,18 37,18 39,18 41,18 43,18 45,18 47,18 69,19 69,21 69,23 69,25 69,27 45.5,34 46.5,34 47.5,34 48.5,34 51,36 52,36 53,36 2.5,39.5 4,39.5 12,39.5 2.5,41 4,41 12,41 2.5,42.5 4,42.5 12,42.5 2.5,44 4,44 12,44 1,49 12,49
IADJ: J3.2 R6.1 R12.1 | length 29
  Top Layer w0.2: J3.2 50,9.7 50.3,10 50.3,10.75 R12.1 50.4,10.85 50.4,11.6 50.8,12 v1(51.5,12) ; R6.1 56.25,30.075 v1(56.25,30.85)
  Bottom Layer w0.2: v1(51.5,12) 51.5,29.5 52.85,30.85 v1(56.25,30.85)
INTVCC: C10.2 IC1.13 R7.1 | length 3.8
  Top Layer w0.2: IC1.13 61.96,35.05 62.41,34.6 63.6,34.6 R7.1 63.91,34.91 C10.2
ISN: IC1.3 J2.1 J2.2 J2.3 R3.1 | length 18.1
  Top Layer w0.2: IC1.3 56.795,35.57 57.213,35.57 57.8,36.157 v1(57.8,37) ; v1(69.25,38.25) R3.1@69.25,40.5
  Layer 2 w0.2: v1(57.8,37) 57.8,37.1 57.8,38.3 59,39.5 68,39.5 v1(69.25,38.25)
ISP: C5.2 C6.2 C7.2 C8.2 C9.2 D1.2 IC1.4 R2.2 R3.2 | length 10.3
  Top Layer w0.2: v1(55.4,35) 55.43,35.03 56.755,35.03 IC1.4
  Bottom Layer w0.2: v1(55.4,35) 56.1,35 56.9,35.8 56.9,41.65 v1(57.75,42.5)
LED_GND: IC4.5 IC4.6 IC4.7 IC4.8 J2.4 J2.5 J2.6
NetC11_2: C11.2 R9.2 | length 1.7
  Top Layer w0.2: C11.2 56.51,27.95 56.51,28.236 56.85,28.576 56.85,28.6 57.25,29 R9.2
NetC12_2: C12.2 IC1.10 | length 3.2
  Top Layer w0.2: IC1.10 61.345,33.53 61.777,33.53 62.253,33.053 62.253,32.541 62.994,31.8 C12.2
NetIC1_5: IC1.5 R9.1 | length 7.2
  Top Layer w0.2: R9.1@56.275,29.1 55.467,29.1 55.35,29.217 55.35,33.623 56.257,34.53 56.755,34.53 IC1.5
NetIC1_11: IC1.11 R10.2 | length 5.4
  Top Layer w0.2: IC1.11 61.345,34.03 61.843,34.03 62.653,33.219 62.653,32.922 63.076,32.5 R10.2
NetL1_2: L1.2 L2.1
OPENLED: IC1.9 J3.4 R7.2 | length 48.2
  Top Layer w0.2: J3.4 v1(46,10.5) ; IC1.9 61.645,33.05 61.698,32.997 61.736,32.997 61.853,32.88 61.853,31.951 62.3,31.504 v1(62.3,31.3) ; R7.2 65.625,34.8 65.938,35.113 v1(66.025,35.113)
  Layer 2 w0.2: v1(46,10.5) 46,10 46.5,9.5 55.5,9.5 61,15 v1(61,21.5) ; v1(62.3,31.3) 62.3,31.387 v1(66.025,35.113)
  Bottom Layer w0.2: v1(61,21.5) 63.75,24.25 63.75,30.75 63.2,31.3 v1(62.3,31.3)
PWMIN: IC1.8 J3.3 | length 32.3
  Top Layer w0.2: J3.3 v1(48,10.5) ; v1(56.5,32.25) 56.5,32.316 56.158,32.658 56.158,32.908 56.28,33.03 56.755,33.03 IC1.8
  Bottom Layer w0.2: v1(48,10.5) 50,12.5 50,30.5 51.75,32.25 v1(56.5,32.25)
PWMOUT: IC1.1 IC4.4 | length 9.7
  Top Layer w0.2: v1(54.15,37) 55.5,37 55.95,36.55 IC1.1
  Top Layer w0.3: IC4.4 50.125,33.855 50.125,35.045 v1(50.155,35.075)
  Layer 2 w0.2: v1(50.155,35.075) 50.155,36.455 50.7,37 v1(54.15,37)
SENSE: IC1.15 IC2.1 IC2.2 IC2.3 IC3.1 IC3.2 IC3.3 R11.2 | length 26.8
  Top Layer w0.2: IC1.15 61.345,36.07 61.777,36.07 62.069,36.363 62.069,36.998 62.083,36.998 62.185,37.1 v1(62.2,37.115)
  Layer 2 w0.2: v1(44.2,28.421) 44.296,28.421 44.825,28.95 60.081,28.95 61.202,30.071 61.202,33.5 61.202,36.137 62.166,37.1 62.181,37.115 v1(62.2,37.115)
SW: D1.1 IC2.5 IC2.6 IC2.7 IC2.8 IC3.5 IC3.6 IC3.7 IC3.8 L2.2
UVLO: IC1.12 R1.1 R5.2 | length 5.6
  Top Layer w0.2: IC1.12 61.345,34.53 61.908,34.53 62.469,33.969 62.969,33.469 63.206,33.469 R5.2 63.45,33.3 63.65,33.5 63.65,33.524 64.126,34 R1.1
pads on no net: FID1.F FID2.F FID3.F IC1.7 L1.3 L2.3

## Polygon pours and split planes (outlines as drawn)
GND on Top Layer "GND_L01_P015" (solid, remove dead copper, pour order 15): 45,40 45,33 54.5,33 cw(c54.5,32.5) 55,32.5 55,23.54 ccw(c57.54,23.54) 57.54,21 62,21 62,27.5 cw(c63,27.5) 63,28.5 65.5,28.5 69.5,32 69.5,37 66.5,39 62.5,40
GND on Top Layer "GND_L01_P014" (solid, remove dead copper, pour order 14): 0,50 13,50 13,39 5.5,39 5.5,31.5 ccw(c7,31.5) 7,30 9,30 cw(c9,28.5) 10.5,28.5 10.5,20 cw(c9,20) 9,18.5 8,18.5 ccw(c8,17) 6.5,17 6.5,6 ccw(c8.5,6) 8.5,4 14.5,4 ccw(c14.5,6) 16.5,6 16.5,6.5 cw(c18.5,6.5) 18.5,8.5 31.5,8.5 ccw(c31.5,10.5) 33.5,10.5 33.5,19 49.5,19 49.5,17 ccw(c52,17) 52,14.5 67,14.5 ccw(c67,15.5) 68,15.5 68,29.393 cw(c68.902,29.393) 68.902,30.295 72.205,30.295 cw(c72.205,30) 72.5,30 72.5,0 0,0
NetL1_2 on Top Layer "NETL1_2_L01_P011" (solid, remove dead copper, pour order 11): 23.5,33.5 ccw(c22,33.5) 22,35 16,35 ccw(c16,33.5) 14.5,33.5 14.5,17 ccw(c16,17) 16,15.5 22,15.5 ccw(c22,17) 23.5,17
ISN on Top Layer "ISN_L01_P010" (solid, remove dead copper, pour order 10): 67,21.5 ccw(c67,22.5) 68,22.5 68,29.3 cw(c69,29.3) 69,30.3 ccw(c69,32.8) 71.5,32.8 71.5,45 ccw(c71,45) 71,45.5 66.5,45.5 ccw(c66.5,45) 66,45 66,37.5 ccw(c66.5,37.5) 66.5,37 68,37 cw(c68,36) 69,36 69,32.5 cw(c68,32.5) 68,31.5 ccw(c68,29.086) 66.293,30.793 64.707,29.207 cw(c63,30.914) 63,28.5 ccw(c63,27.5) 62,27.5 62,22.5 ccw(c63,22.5) 63,21.5
LED_GND on Top Layer "LED_GND_L01_P009" (solid, remove dead copper, pour order 9): 54.6,32.7 54.6,23.34 ccw(c57.14,23.34) 57.14,20.8 67.2,20.8 cw(c67.2,20) 68,20 68,15.3 cw(c67.2,15.3) 67.2,14.5 51.94,14.5 cw(c51.94,17.04) 49.4,17.04 49.4,32.7
ISP on Top Layer "ISP_L01_P007" (solid, remove dead copper, pour order 7): 45,38.5 cw(c44.5,38.5) 44.5,38 42.5,38 cw(c42.5,38.5) 42,38.5 42,46 cw(c43.5,46) 43.5,47.5 53.5,47.5 cw(c53.5,46) 55,46 55,43 ccw(c55.5,43) 55.5,42.5 58.5,42.5 ccw(c58.5,43.5) 59.5,43.5 59.5,44.5 cw(c60.5,44.5) 60.5,45.5 64.5,45.5 cw(c64.5,44.5) 65.5,44.5 65.5,39.5 cw(c64.5,39.5) 64.5,38.5 62.5,38.5 62.5,40 45,40
SENSE on Top Layer "SENSE_L01_P006" (solid, remove dead copper, pour order 6): 45,38
SENSE on Top Layer "SENSE_L01_P005" (solid, remove dead copper, pour order 5): 42,20 47.5,20 ccw(c47.5,21) 48.5,21 48.5,32 ccw(c47.375,32.125) 47.5,33.25 45.5,33.25 cw(c45.5,34) 44.75,34 44.75,34.5 ccw(c44,34.5) 44,35.25 41.75,35.25
SENSE on Top Layer "SENSE_L01_P004" (solid, remove dead copper, pour order 4): 41.7,23.6
SW on Top Layer "SW_L01_P003" (solid, remove dead copper, pour order 3): 41,46 ccw(c39.5,46) 39.5,47.5 31.5,47.5 ccw(c31.5,46) 30,46 30,44 cw(c27.5,44) 27.5,41.5 27,41.5 ccw(c27,39.5) 25,39.5 25,24 31.5,24 cw(c31.75,21.75) 34,22 34,21.5 ccw(c35.5,21.5) 35.5,20 39.75,20 ccw(c39.625,21.375) 41,21.5
48V on Top Layer "48V_L01_P001" (solid, remove dead copper, pour order 1): 25,23.5 31.5,23.5 cw(c31.5,21.5) 33.5,21.5 33.5,10.5 cw(c31.5,10.5) 31.5,8.5 18.5,8.5 ccw(c18.5,6.5) 16.5,6.5 16.5,6 cw(c14.5,6) 14.5,4 8.5,4 cw(c8.5,6) 6.5,6 6.5,17 cw(c8,17) 8,18.5 9,18.5 ccw(c9,20) 10.5,20 10.5,28.5 ccw(c9,28.5) 9,30 7,30 cw(c7,31.5) 5.5,31.5 5.5,37.5 cw(c6,37.5) 6,38 12,38 cw(c12,37) 13,37 13,16.54 ccw(c15.54,16.54) 15.54,14 23,14 ccw(c23,16) 25,16
GND on Layer 1 "GND_L02_P012" (solid, remove dead copper, pour order 12): 0,0 0,50 72.5,50 72.5,0
GND on Bottom Layer "GND_L04_P013" (solid, remove dead copper, pour order 13): 0,0 0,50 72.5,50 72.5,0

## Keep-outs
Keep-Out Layer:
  lines w0.2: 65,48 cw(c65,50) 63,50 0,50 0,0 72.5,0 72.5,50 67,50 cw(c65,50) 65,48 ; 65,48 65,48

## Other copper
Top Layer:
  region net NetL1_2: 15.5,16.5

## Silkscreen, mask and mechanical layers (free items; w line width, h text height)
Top Overlay:
  lines w3: 61.737,48.479 ccw(c65,50) 68.263,48.479
Bottom Overlay:
  lines w3: 61.737,48.479 ccw(c65,50) 68.263,48.479